# Altium PCB Panorama_V_0_0_1.PcbDoc (part 1 of 2)
Units mm, origin at the board's own origin, x right, y up, seen from the top; angles counter-clockwise.
Board outline 60 x 100 mm, 4 copper layers (Top Layer, Layer 2, Layer 3, Bottom Layer), stack 0.745 mm thick; 113 components, 88 nets, 449 pads, 202 vias.
Unrouted connection lines stored in the file: 3.
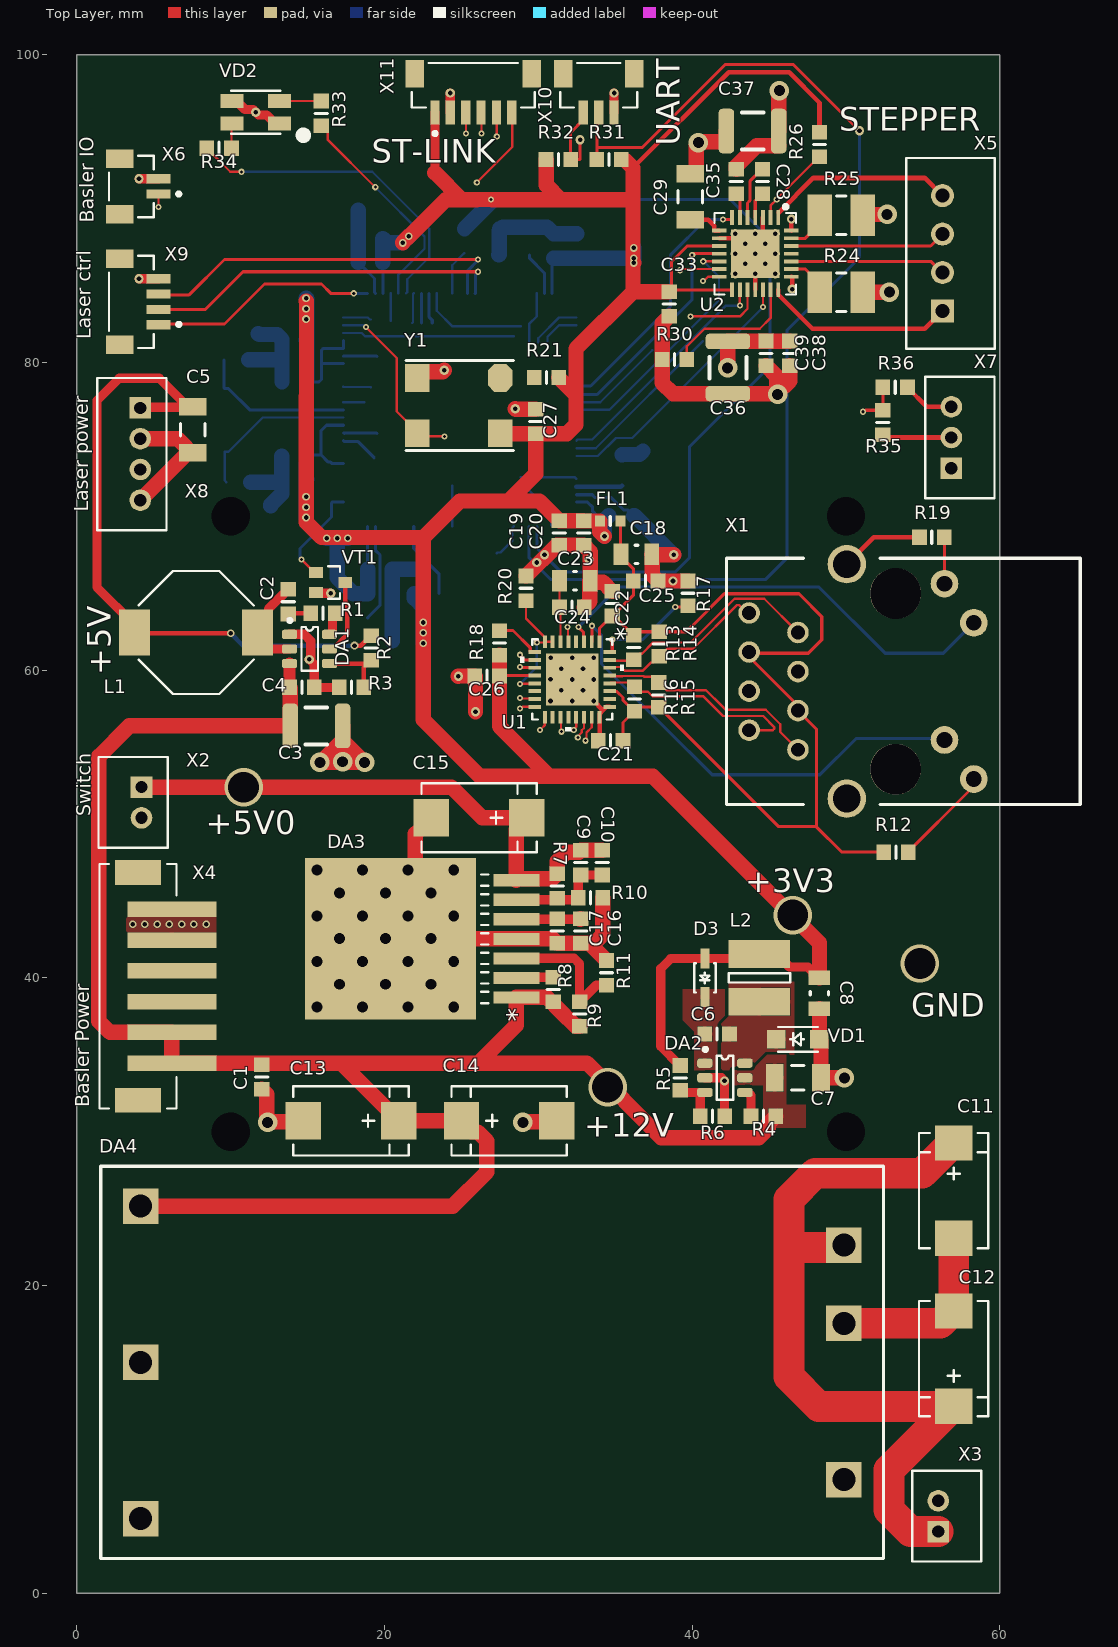
[diagram p0: Top Layer view]
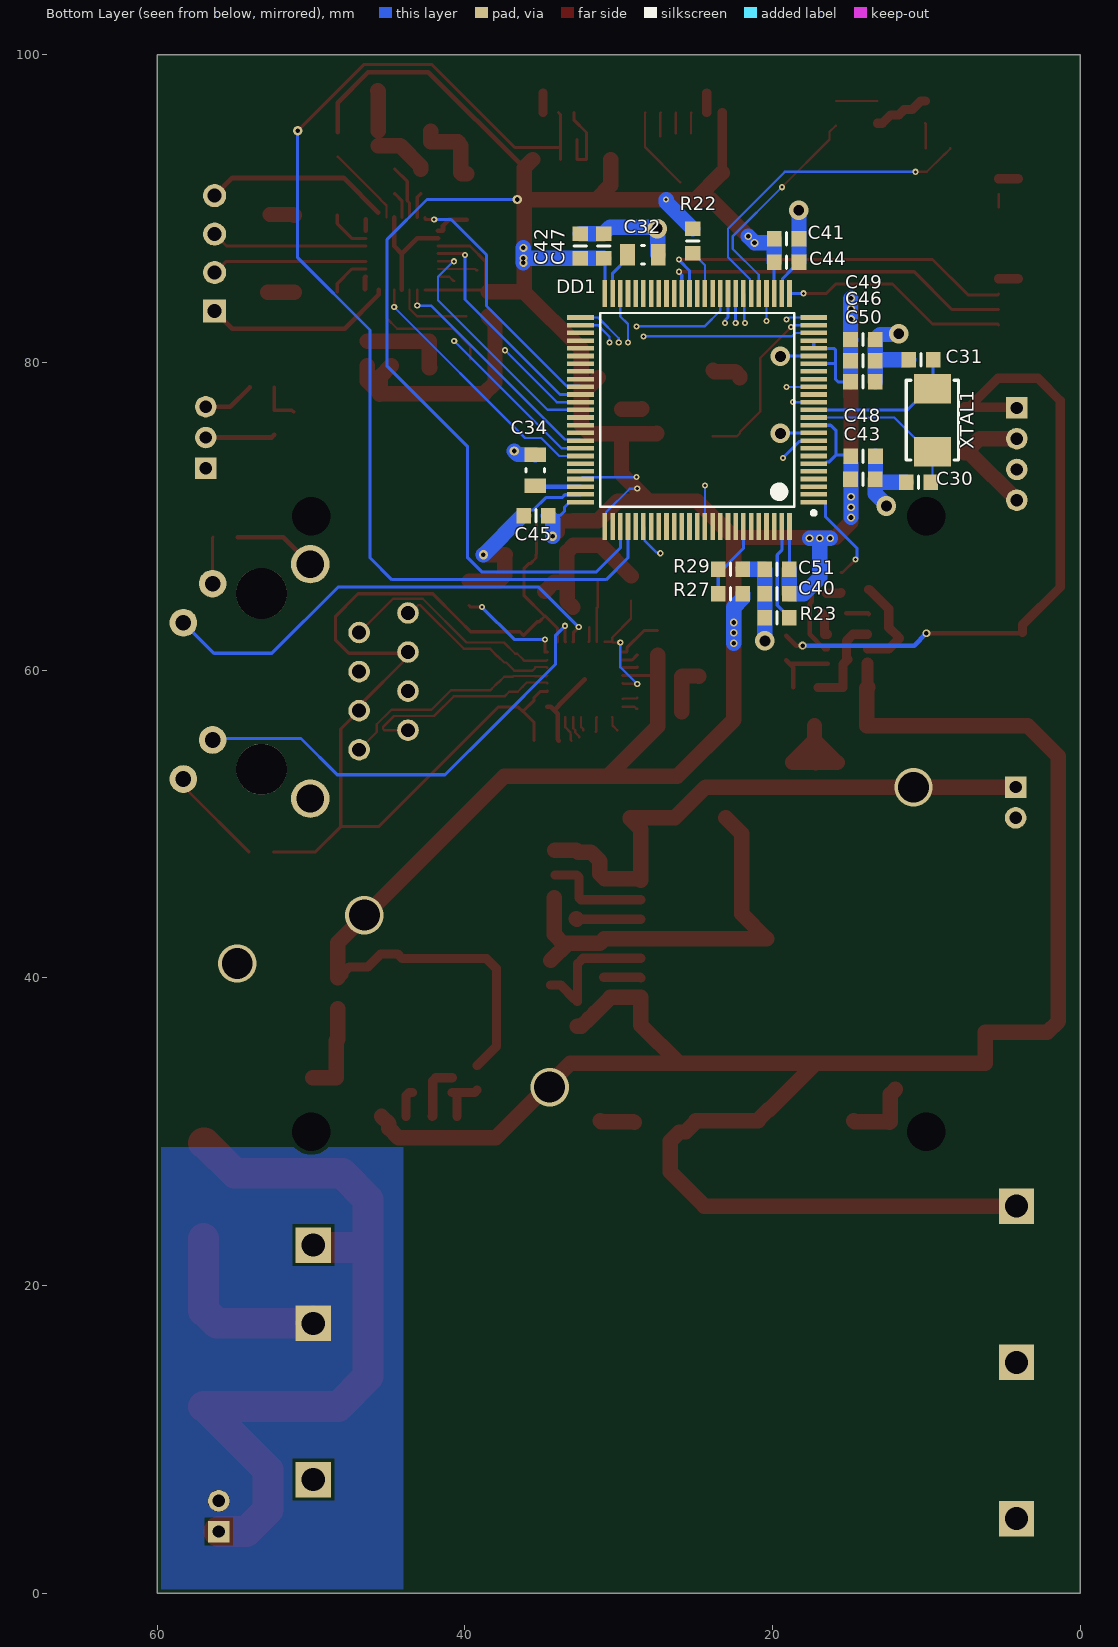
[diagram p1: Bottom Layer view, seen from below]
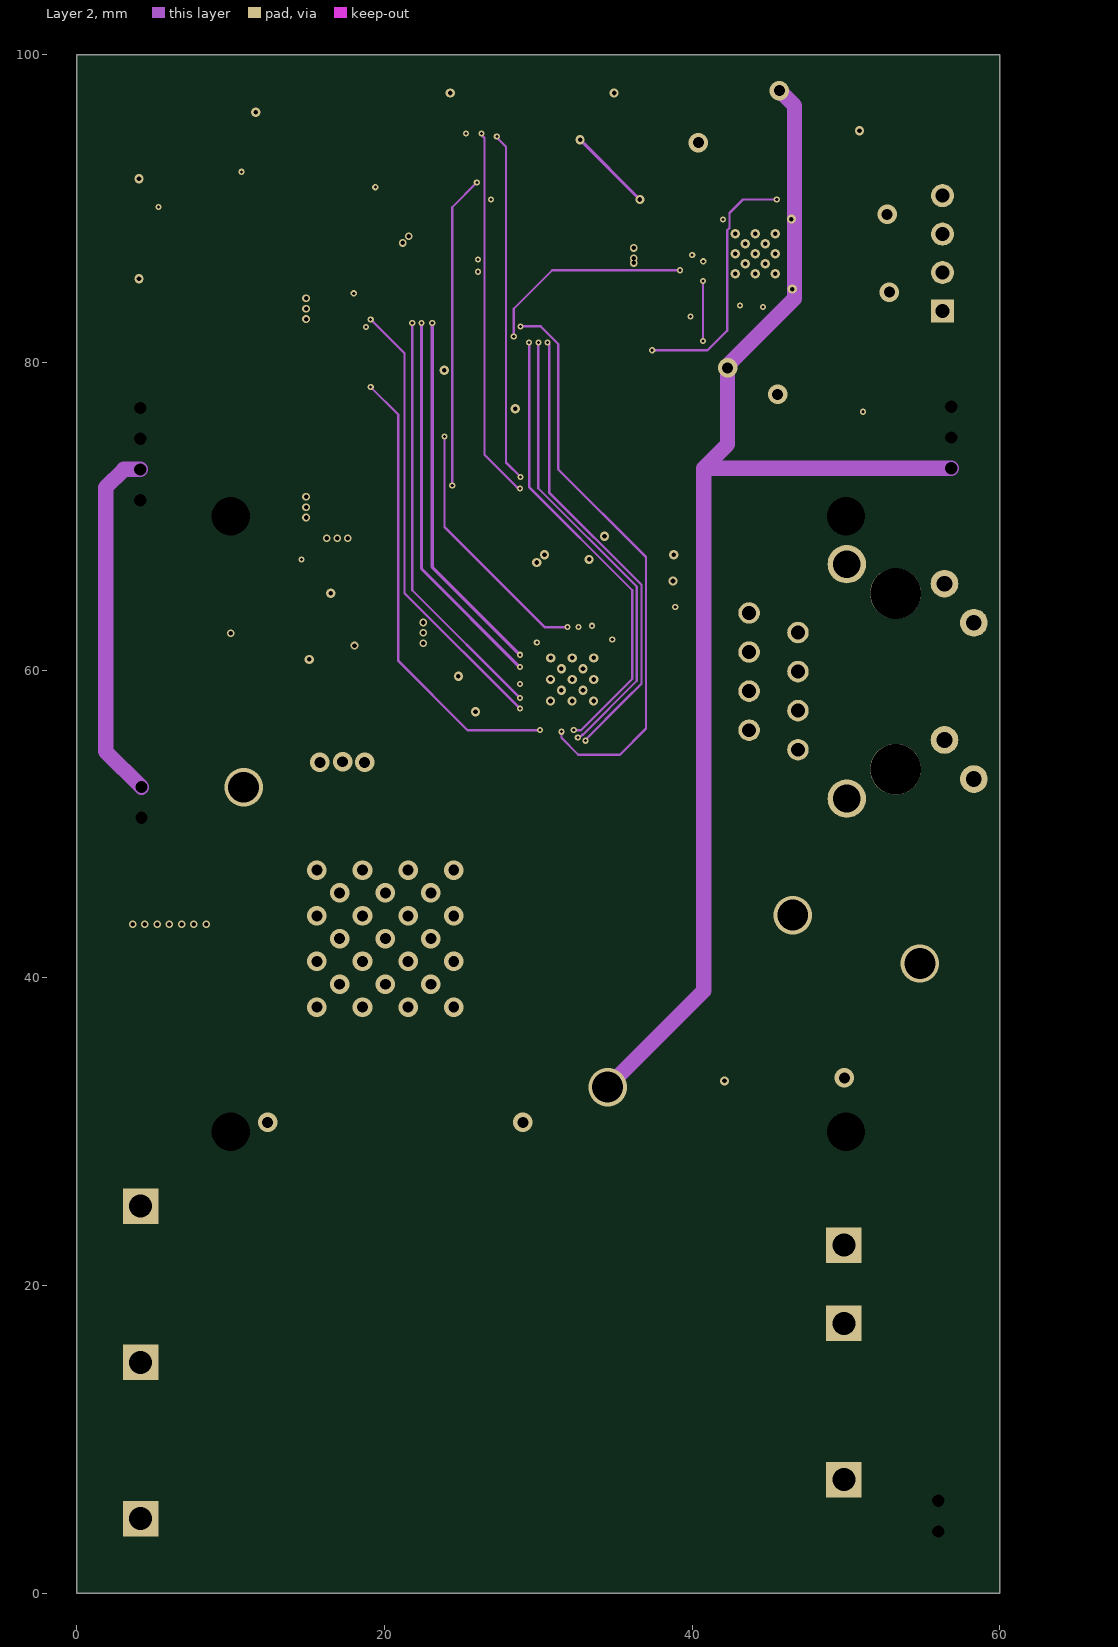
[diagram p2: Layer 2]
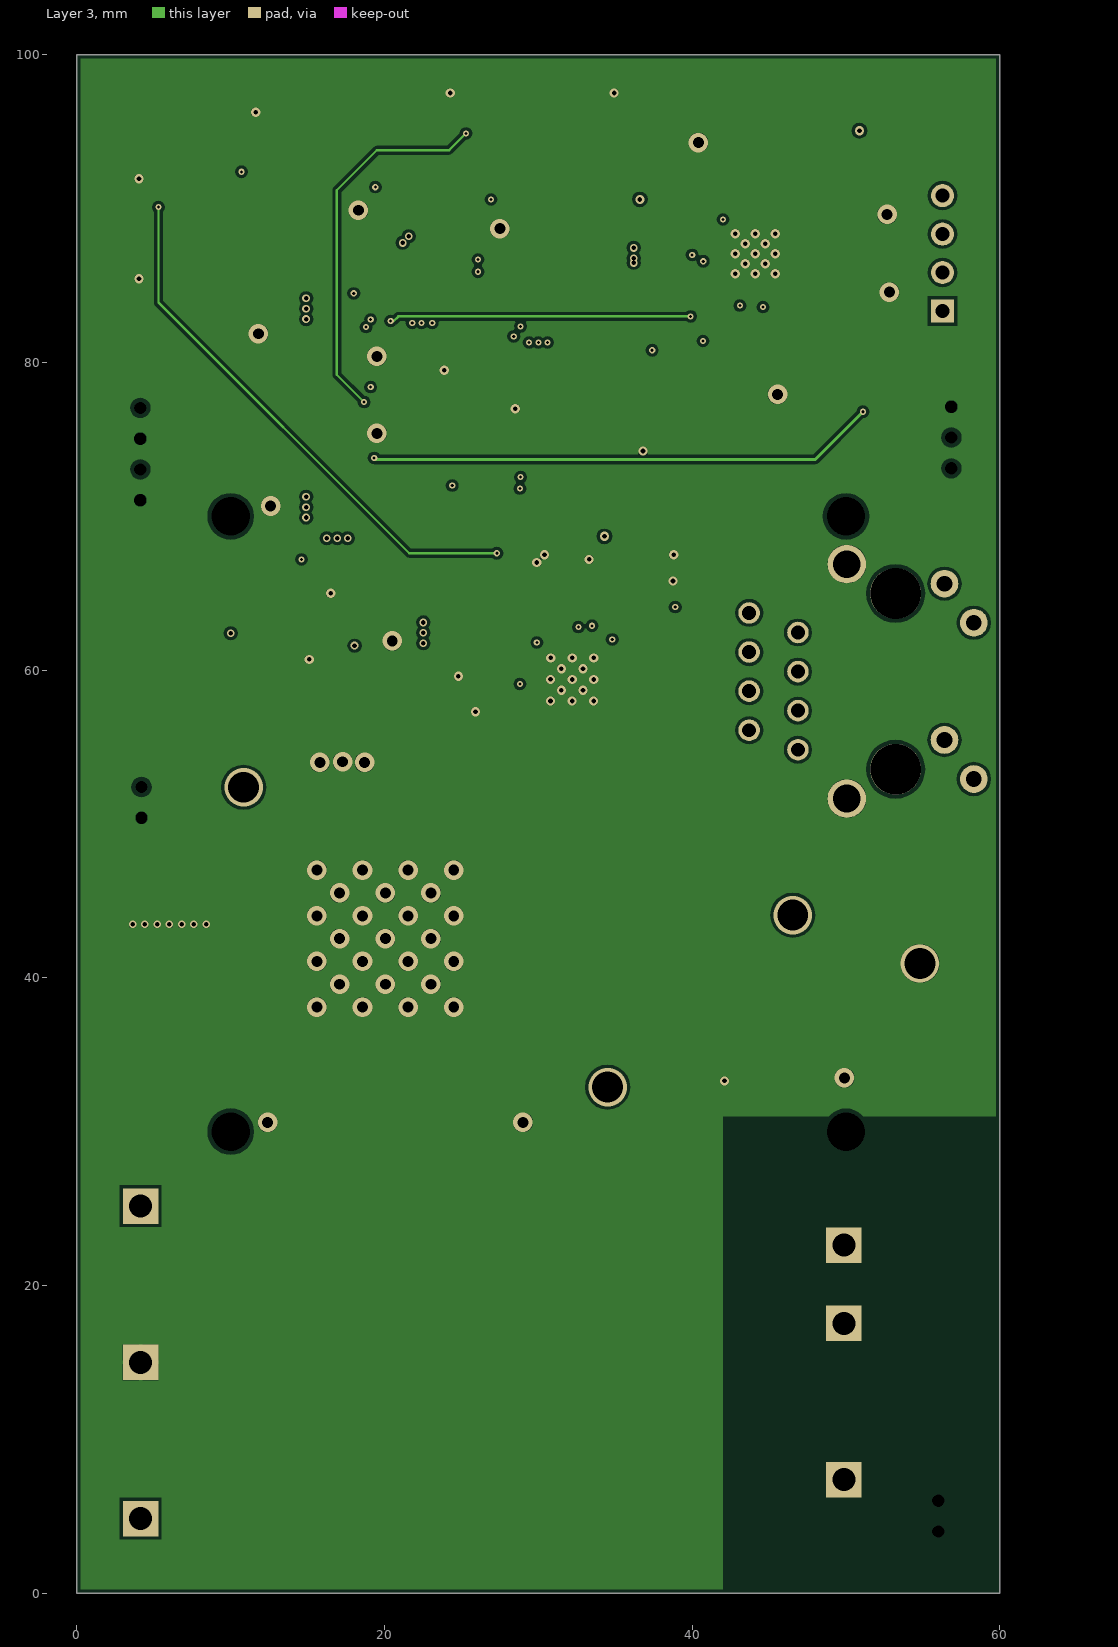
[diagram p3: Layer 3]
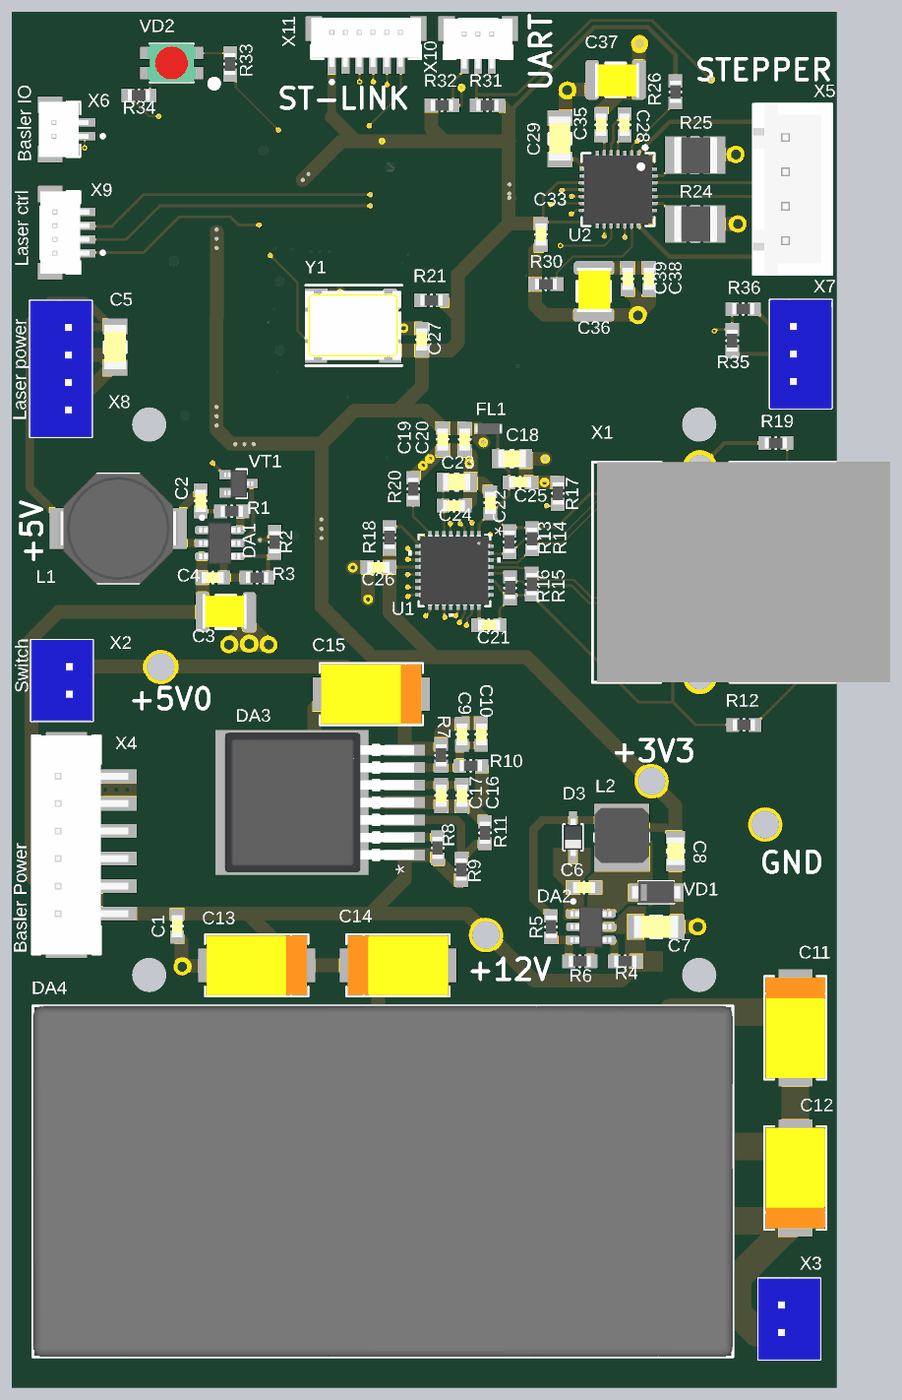
[diagram p5: 3D render of the assembled board from above, using the file's embedded part models]
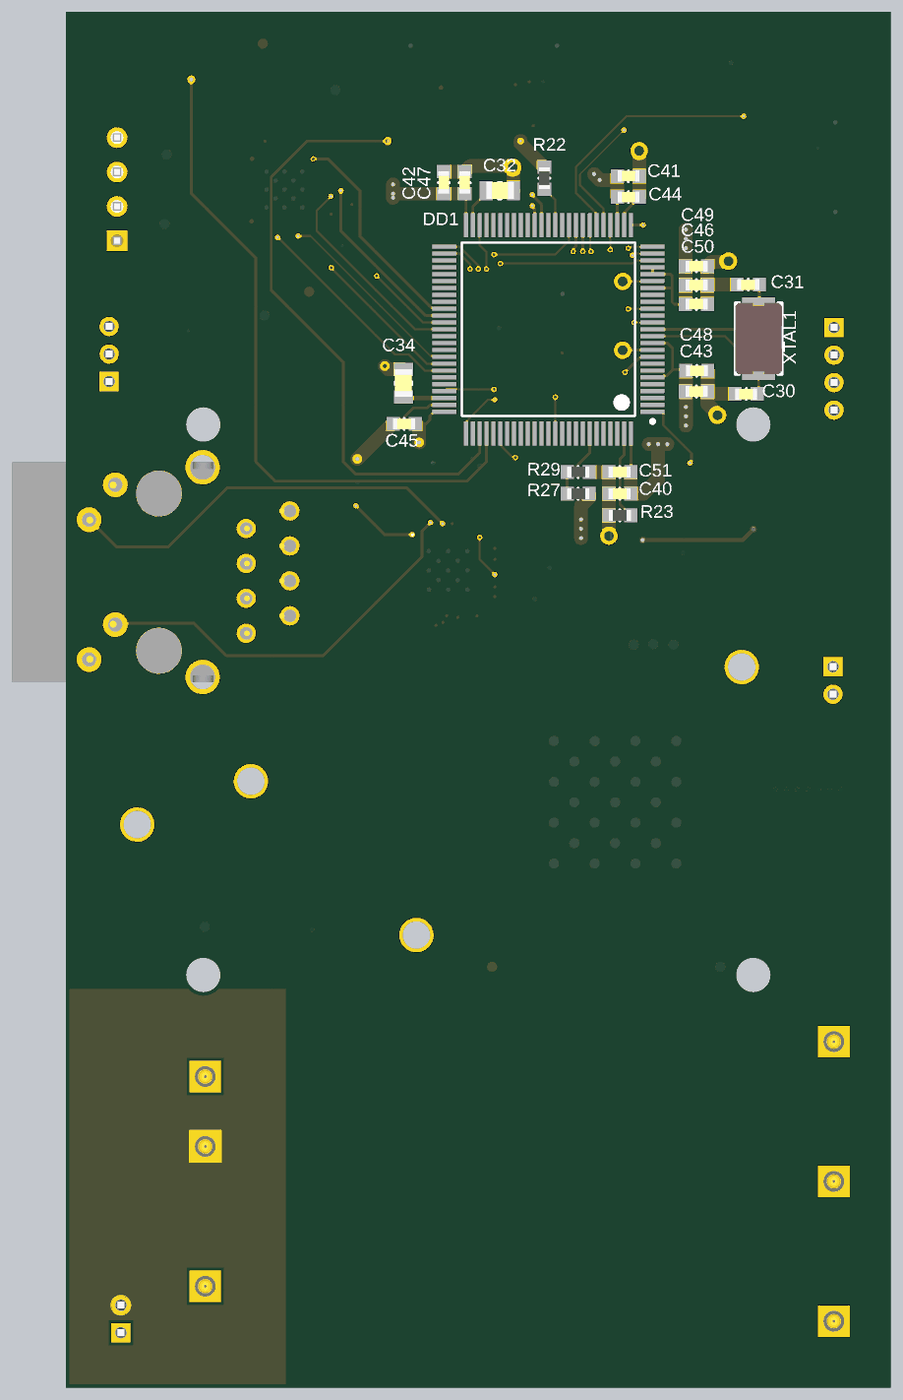
[diagram p6: 3D render of the assembled board from below, using the file's embedded part models]

## Layer stack, top to bottom
Top Solder: solder mask 0.0102, Solder Resist, Dk 3.5
Top Layer: signal copper 0.035
Dielectric 2: prepreg 0.0711, PP-006, Dk 4.1
Dielectric 3: prepreg 0.0711, PP-006, Dk 4.1
Layer 2: signal copper 0.035
Dielectric 1: dielectric 0.32, FR-4, Dk 4.8
Layer 3: signal copper 0.035
Dielectric 4: prepreg 0.0711, PP-006, Dk 4.1
Dielectric 5: prepreg 0.0711, PP-006, Dk 4.1
Bottom Layer: signal copper 0.035
Bottom Solder: solder mask 0.0102, Solder Resist, Dk 3.5

## Board outline
0,0 0,100 60,100 60,0

## Design rules (kind name [scope] priority, off if disabled: settings)
AcuteAngle [All] p1: minimum=3.50000000000000E+0001 checktracksonly=FALSE
BoardOutlineClearance "BoardOutlineClearance 1" [All] p1: gap=0.25 ignorepadtopadclearanceinfootprint=FALSE except(0: Arc-SplitContinuation Track-SplitContinuation SMDPad-SplitContinuation THPad-SplitContinuation Via-SplitContinuation Fill-SplitContinuation Poly-SplitContinuation Region-SplitContinuation Text-SplitContinuation) // Milling
BoardOutlineClearance "BoardOutlineClearance 2" [All] p2: gap=0.4 ignorepadtopadclearanceinfootprint=FALSE except(0: Arc-SplitContinuation Track-SplitContinuation SMDPad-SplitContinuation THPad-SplitContinuation Via-SplitContinuation Fill-SplitContinuation Poly-SplitContinuation Region-SplitContinuation Text-SplitContinuation) // V-Cut
Clearance "Clearance 3 Oz" [All] p1 off: gap=0.35 ignorepadtopadclearanceinfootprint=FALSE except(0.25: Arc-Hole Track-Hole SMDPad-Hole THPad-Hole Via-Hole Fill-Hole Poly-Hole Region-Hole Text-Hole)
Clearance "Clearance 2 Oz" [All] p2 off: gap=0.3 ignorepadtopadclearanceinfootprint=FALSE except(0.25: Arc-Hole Track-Hole SMDPad-Hole THPad-Hole Via-Hole Fill-Hole Poly-Hole Region-Hole Text-Hole)
Clearance "Clearance-1 1 Oz" [All] p3 off: gap=0.2 ignorepadtopadclearanceinfootprint=FALSE except(0.25: Arc-Hole Track-Hole SMDPad-Hole THPad-Hole Via-Hole Fill-Hole Poly-Hole Region-Hole Text-Hole) // Standart
Clearance "Clearance-2 1 Oz" [All] p4: gap=0.15 ignorepadtopadclearanceinfootprint=FALSE except(0.2: Arc-Fill Arc-Poly Track-Fill Track-Poly SMDPad-Fill SMDPad-Poly THPad-Fill THPad-Poly Via-Fill Via-Poly Fill-Fill Fill-Poly Poly-Poly; 0.25: Arc-Hole Track-Hole SMDPad-Hole THPad-Hole Via-Hole Fill-Hole Poly-Hole Region-Hole Text-Hole) // Advance
Clearance "Clearance-1 1/2 Oz" [All] p5 off: gap=0.125 ignorepadtopadclearanceinfootprint=FALSE except(0.2: Arc-Fill Arc-Poly Track-Fill Track-Poly SMDPad-SMDPad SMDPad-Fill SMDPad-Poly THPad-Fill THPad-Poly Via-Fill Via-Poly Fill-Fill Fill-Poly Poly-Poly Poly-Region Poly-Text; 0.25: Arc-Hole Track-Hole SMDPad-Hole THPad-Hole Via-Hole Fill-Hole Poly-Hole Region-Hole Text-Hole) // Standart
Clearance "Clearance-2 1/2 Oz" [All] p6 off: gap=0.1 ignorepadtopadclearanceinfootprint=FALSE except(0.15: Arc-Fill Arc-Poly Track-Fill Track-Poly SMDPad-SMDPad SMDPad-Fill SMDPad-Poly THPad-Fill THPad-Poly Via-Fill Via-Poly Fill-Fill Fill-Poly Poly-Poly Poly-Region Poly-Text; 0.25: Arc-Hole Track-Hole SMDPad-Hole THPad-Hole Via-Hole Fill-Hole Poly-Hole Region-Hole Text-Hole) // Advance
DiffPairsRouting "DiffPairsRouting 1 Oz" [All] p1: maxlimit=0.254 minlimit=0.2 mostfreqgap=0.254 toplayer_minwidth=0.1 toplayer_maxwidth=0.381 toplayer_prefwidth=0.15 midlayer1_minwidth=0.1 midlayer1_maxwidth=0.381 midlayer1_prefwidth=0.15 midlayer2_minwidth=0.1 midlayer2_maxwidth=0.381 midlayer2_prefwidth=0.15 bottomlayer_minwidth=0.1 bottomlayer_maxwidth=0.381 bottomlayer_prefwidth=0.15 maxuncoupledlength=12.7
DiffPairsRouting "DiffPairsRouting 1/2 Oz" [All] p2 off: maxlimit=0.254 minlimit=0.1 mostfreqgap=0.254 toplayer_minwidth=0.1 toplayer_maxwidth=0.381 toplayer_prefwidth=0.381 midlayer1_minwidth=0.1 midlayer1_maxwidth=0.381 midlayer1_prefwidth=0.381 midlayer2_minwidth=0.1 midlayer2_maxwidth=0.381 midlayer2_prefwidth=0.381 bottomlayer_minwidth=0.1 bottomlayer_maxwidth=0.381 bottomlayer_prefwidth=0.381 maxuncoupledlength=12.7
HoleSize "Minimum HoleSize" [IsPad] p1: absolutevalues=TRUE maxlimit=5.9 minlimit=0.6 maxpercent=80.000 minpercent=20.000
HoleSize "Minimum HoleSize VIA 1" [IsVia] p2: absolutevalues=TRUE maxlimit=5.9 minlimit=0.3 maxpercent=80.000 minpercent=20.000 // Standart
HoleSize "Minimum HoleSize VIA 2" [IsVia] p3: absolutevalues=TRUE maxlimit=5.9 minlimit=0.2 maxpercent=80.000 minpercent=20.000 // Advance
HoleToHoleClearance Hole2HoleClearance [All] p1: gap=0.25 allowstackedmicrovias=FALSE
MinimumAnnularRing "Minimum AR VIA Standart" [IsVia] p1: minimumring=0.15
MinimumAnnularRing "Minimum AR PAD Standart" [IsPAD] p2: minimumring=0.2
MinimumAnnularRing "Minimum AR VIA Advance" [IsVia] p3: minimumring=0.1
MinimumAnnularRing "Minimum AR PAD Advance" [IsPAD] p4: minimumring=0.15
MinimumSolderMaskSliver "SolderMask Bridge Standart" [All] p1: minsoldermaskwidth=0.15 // All Masks
MinimumSolderMaskSliver "SolderMask Bridge Advance" [All] p2: minsoldermaskwidth=0.1 // Mask LDI
PlaneClearance "PlaneClearance 3 Oz" [All] p1: clearance=0.35
PlaneClearance "PlaneClearance 2 Oz" [All] p2: clearance=0.3
PlaneClearance "PlaneClearance 1 Oz" [All] p3: clearance=0.2
PlaneClearance "PlaneClearance-1 1/2 Oz" [All] p4: clearance=0.2 // Standart
PlaneClearance "PlaneClearance-2 1/2 Oz" [All] p5: clearance=0.15 // Advance
PlaneConnect "TermalConnect 3 Oz" [All] p1: planeconnectstyle=Relief reliefexpansion=0.2 reliefentries=4 reliefconductorwidth=0.35 reliefairgap=0.35 // Standart
PlaneConnect "TermalConnect 2 Oz" [All] p2: planeconnectstyle=Relief reliefexpansion=0.2 reliefentries=4 reliefconductorwidth=0.3 reliefairgap=0.3 // Standart
PlaneConnect "TermalConnect-1 1 Oz" [All] p3: planeconnectstyle=Relief reliefexpansion=0.2 reliefentries=4 reliefconductorwidth=0.2 reliefairgap=0.2 // Standart
PlaneConnect "TermalConnect-2 1 Oz" [All] p4: pad.planeconnectstyle=Relief pad.reliefexpansion=0.15 pad.reliefentries=4 pad.reliefconductorwidth=0.2 pad.reliefairgap=0.2 via.planeconnectstyle=Direct via.reliefexpansion=0.15 via.reliefentries=4 via.reliefconductorwidth=0.15 via.reliefairgap=0.15 // Advance
PlaneConnect "TermalConnect-1 1/2 Oz" [All] p5: planeconnectstyle=Relief reliefexpansion=0.2 reliefentries=4 reliefconductorwidth=0.2 reliefairgap=0.2 // Standart
PlaneConnect "TermalConnect-2 1/2 Oz" [All] p6: pad.planeconnectstyle=Relief pad.reliefexpansion=0.15 pad.reliefentries=4 pad.reliefconductorwidth=0.15 pad.reliefairgap=0.15 via.planeconnectstyle=Direct via.reliefexpansion=0.15 via.reliefentries=4 via.reliefconductorwidth=0.15 via.reliefairgap=0.15 // Advance
PolygonConnect "PolygonConnect 3 Oz" [All] p1 off: thpad.connectstyle=Relief thpad.reliefconductorwidth=0.35 thpad.reliefentries=4 thpad.polygonreliefangle="90 Angle" thpad.airgapwidth=0.35 smdpad.connectstyle=Relief smdpad.reliefconductorwidth=0.35 smdpad.reliefentries=4 smdpad.polygonreliefangle="90 Angle" smdpad.airgapwidth=0.35 via.connectstyle=Direct via.reliefconductorwidth=0.254 via.reliefentries=4 via.polygonreliefangle="90 Angle" via.airgapwidth=0.254
PolygonConnect "PolygonConnect 2 Oz" [All] p2 off: thpad.connectstyle=Relief thpad.reliefconductorwidth=0.3 thpad.reliefentries=4 thpad.polygonreliefangle="90 Angle" thpad.airgapwidth=0.3 smdpad.connectstyle=Relief smdpad.reliefconductorwidth=0.3 smdpad.reliefentries=4 smdpad.polygonreliefangle="90 Angle" smdpad.airgapwidth=0.3 via.connectstyle=Direct via.reliefconductorwidth=0.254 via.reliefentries=4 via.polygonreliefangle="90 Angle" via.airgapwidth=0.254
PolygonConnect "PolygonConnect-1 1 Oz" [All] p3 off: thpad.connectstyle=Relief thpad.reliefconductorwidth=0.2 thpad.reliefentries=4 thpad.polygonreliefangle="90 Angle" thpad.airgapwidth=0.2 smdpad.connectstyle=Relief smdpad.reliefconductorwidth=0.2 smdpad.reliefentries=4 smdpad.polygonreliefangle="90 Angle" smdpad.airgapwidth=0.2 via.connectstyle=Direct via.reliefconductorwidth=0.254 via.reliefentries=4 via.polygonreliefangle="90 Angle" via.airgapwidth=0.254 // Standart
PolygonConnect "PolygonConnect-2 1 Oz" [All] p4 off: thpad.connectstyle=Relief thpad.reliefconductorwidth=0.15 thpad.reliefentries=4 thpad.polygonreliefangle="90 Angle" thpad.airgapwidth=0.15 smdpad.connectstyle=Relief smdpad.reliefconductorwidth=0.15 smdpad.reliefentries=4 smdpad.polygonreliefangle="90 Angle" smdpad.airgapwidth=0.15 via.connectstyle=Direct via.reliefconductorwidth=0.254 via.reliefentries=4 via.polygonreliefangle="90 Angle" via.airgapwidth=0.254 // Advance
PolygonConnect "PolygonConnect-1 1/2 Oz" [All] p5 off: thpad.connectstyle=Relief thpad.reliefconductorwidth=0.15 thpad.reliefentries=4 thpad.polygonreliefangle="90 Angle" thpad.airgapwidth=0.2 smdpad.connectstyle=Relief smdpad.reliefconductorwidth=0.2 smdpad.reliefentries=4 smdpad.polygonreliefangle="90 Angle" smdpad.airgapwidth=0.2 via.connectstyle=Direct via.reliefconductorwidth=0.254 via.reliefentries=4 via.polygonreliefangle="90 Angle" via.airgapwidth=0.254 // Standart
PolygonConnect "PolygonConnect-2 1/2 Oz" [All] p6 off: thpad.connectstyle=Relief thpad.reliefconductorwidth=0.125 thpad.reliefentries=4 thpad.polygonreliefangle="90 Angle" thpad.airgapwidth=0.15 smdpad.connectstyle=Relief smdpad.reliefconductorwidth=0.125 smdpad.reliefentries=4 smdpad.polygonreliefangle="90 Angle" smdpad.airgapwidth=0.15 via.connectstyle=Direct via.reliefconductorwidth=0.254 via.reliefentries=4 via.polygonreliefangle="90 Angle" via.airgapwidth=0.254 // Advance
RoutingVias [All] p1: holewidth=0.3 width=0.6 viastyle="Through Hole" minholewidth=0.2 minwidth=0.4 maxholewidth=5.9 maxwidth=6.4
SMDNeckDown [All] p1 off: percent=50.000
SilkToSilkClearance Silk2SilkClearance [All] p1 off: silktosilkclearance=0.15
SilkToSolderMaskClearance Silk2SolderMaskClearance [IsPad] p1 off: minsilkscreentomaskgap=0.15 clearancetoexposedcopper=TRUE
SolderMaskExpansion SolderMaskExpansion-1 [All] p1: expansion=0.05 istentingtop=FALSE // Standart
SolderMaskExpansion "SolderMaskExpansion LDI" [All] p2: expansion=0.025 istentingtop=FALSE // Advance
UnRoutedNet [All] p1: checkbadconnections=TRUE
UnpouredPolygon [All] p1 off:
Width "Width 3 Oz" [All] p1 off: maxlimit=10 minlimit=0.35 preferedwidth=0.4 checkconnectedcopper=TRUE
Width "Width 2 Oz" [All] p2 off: maxlimit=10 minlimit=0.3 preferedwidth=0.35 minimp=50.000000 maximp=50.000000 favimp=50.000000 checkconnectedcopper=TRUE
Width "Width 1 Oz" [All] p3: maxlimit=10 minlimit=0.15 preferedwidth=0.2 checkconnectedcopper=TRUE
Width "Width 1/2 Oz" [All] p4 off: maxlimit=10 minlimit=0.1 preferedwidth=0.125 checkconnectedcopper=TRUE
20 further rules are at their usual default settings.

## Classes and differential pairs
component class U_POWER: C2 C3 C4 C5 C6 C7 C8 C9 C10 C11 C12 C13 C14 C15 C16 C17 D3 DA1 DA2 DA3 DA4 L1 L2 R1 R2 R3 R4 R5 R6 R7 R8 R9 R10 R11 VD1 VT1
component class U_MCU: C28 C29 C30 C31 C32 C33 C34 C35 C36 C37 C38 C39 C40 C41 C42 C43 C44 C45 C46 C47 C48 C49 C50 C51 DD1 R22 R23 R24 R25 R26 R27 R29 R30 R31 R32 R33 R34 R35 R36 U2 VD2 XTAL1
component class U_LAN: C18 C19 C20 C21 C22 C23 C24 C25 C26 C27 FL1 R12 R13 R14 R15 R16 R17 R18 R19 R20 R21 U1 Y1
component class Panorama_V_0_0_1: C1 X1 X2 X3 X4 X5 X6 X7 X8 X9 X10 X11
differential pair TX: +TX_P -TX_N
differential pair RX: +RX_P -RX_N

## Components (designator, comment, footprint, x,y, rotation, side; value= is the part's Value field where it differs from the comment)
C1 "C0603-0.1uF-50V-X7R" C0603 12.025,33.55 r90 top value=0.1uF
C2 "C0603-0.1uF-50V-X7R" C0603 13.75,64.45 r270 top value=0.1uF
C3 "C1210-10uF-50V-X7R" C1210 15.575,56.379 r180 top value=10uF
C4 "C0603-0.1uF-50V-X7R" C0603 14.625,58.879 r0 top value=0.1uF
C5 "C1206-100uF-10V-X5R" C1206 7.525,75.625 r90 top value=100uF
C6 "C0603-0.1uF-50V-X7R" C0603 41.625,36.35 r180 top value=0.1uF
C7 "C1206-2.2uF-50V-X7R" C1206 46.875,33.5 r180 top value=2.2uF
C8 "C0805-22uF-10V-X5R" C0805 48.275,39 r90 top value=22uF
C9 "C0603-0.012uF-50V-X7R" C0603 32.753,47.488 r90 top value=0.012uF
C10 "C0603-0.01uF-50V-X7R" C0603 34.15,47.488 r90 top value=0.01uF
C11 "CTD-22uF-35V" CTD 57,26.162 r270 top value=22uF
C12 "CTD-22uF-35V" CTD 57,15.24 r90 top value=22uF
C13 "CTD-22uF-35V" CTD 17.825,30.7 r180 top value=22uF
C14 "CTD-22uF-35V" CTD 28.1,30.7 r0 top value=22uF
C15 "CTD-100uF-16V" CTD 26.149,50.409 r180 top value=100uF
C16 "C0603-0.01uF-50V-X7R" C0603 32.753,43.043 r90 top value=0.01uF
C17 "C0603-0.012uF-50V-X7R" C0603 31.229,43.043 r90 top value=0.012uF
C18 "C0805-22uF-10V-X5R" C0805 36.376,67.522 r180 top value=22uF
C19 "C0603-22uF-6.3V-X5R" C0603 31.351,68.922 r90 top value=22uF
C20 "C0603-22uF-6.3V-X5R" C0603 32.951,68.922 r90 top value=22uF
C21 "C0603-0.1uF-50V-X7R" C0603 34.701,55.422 r180 top value=0.1uF
C22 "C0603-0.1uF-50V-X7R" C0603 34.801,64.322 r90 top value=0.1uF
C23 "C0805-22uF-10V-X5R" C0805 32.376,65.822 r0 top value=22uF
C24 "C0603-0.1uF-50V-X7R" C0603 32.176,64.097 r0 top value=0.1uF
C25 "C0603-0.1uF-50V-X7R" C0603 36.975,65.8 r180 top value=0.1uF
C26 "C0603-0.1uF-50V-X7R" C0603 26.675,59.625 r0 top value=0.1uF
C27 "C0603-0.1uF-50V-X7R" C0603 29.825,76.175 r270 top value=0.1uF
C28 "C0603-2200pF-50V-X7R" C0603 44.575,91.775 r270 top value=2200pF
C29 "C1206-2.2uF-25V-X5R" C1206 39.875,90.775 r270 top value=2.2uF
C30 "C0603-12pF-50V-NP0" C0603 10.51,72.225 r180 bottom value=12pF
C31 "C0603-12pF-50V-NP0" C0603 10.36,80.175 r180 bottom value=12pF
C32 "C0805-2.2uF-16V-Y5V" C0805 28.435,87 r0 bottom value=2.2uF
C33 "C0603-0.1uF-50V-X7R" C0603 38.5,83.8 r270 top value=0.1uF
C34 "C0805-2.2uF-16V-Y5V" C0805 35.435,73 r270 bottom value=2.2uF
C35 "C0603-0.1uF-50V-X7R" C0603 42.875,91.775 r270 top value=0.1uF
C36 "C1210-10uF-50V-X7R" C1210 42.325,79.675 r90 top value=10uF
C37 "C1210-10uF-50V-X7R" C1210 43.925,95.05 r0 top value=10uF
C38 "C0603-0.1uF-50V-X7R" C0603 46.35,80.6 r90 top value=0.1uF
C39 "C0603-1uF-50V-X5R" C0603 44.8,80.6 r90 top value=1uF
C40 "C0603-0.1uF-50V-X7R" C0603 19.71,64.975 r180 bottom value=0.1uF
C41 "C0603-4.7uF-16V-X5R" C0603 19.085,88.05 r0 bottom value=4.7uF
C42 "C0603-0.1uF-50V-X7R" C0603 32.51,87.575 r270 bottom value=0.1uF
C43 "C0603-4.7uF-16V-X5R" C0603 14.135,72.4 r0 bottom value=4.7uF
C44 "C0603-0.1uF-50V-X7R" C0603 19.085,86.525 r0 bottom value=0.1uF
C45 "C0603-4.7uF-16V-X5R" C0603 35.385,70.05 r180 bottom value=4.7uF
C46 "C0603-0.1uF-50V-X7R" C0603 14.135,80.125 r0 bottom value=0.1uF
C47 "C0603-4.7uF-16V-X5R" C0603 30.985,87.575 r270 bottom value=4.7uF
C48 "C0603-0.1uF-50V-X7R" C0603 14.11,73.9 r0 bottom value=0.1uF
C49 "C0603-4.7uF-16V-X5R" C0603 14.135,81.5 r0 bottom value=4.7uF
C50 "C0603-0.1uF-50V-X7R" C0603 14.135,78.744 r0 bottom value=0.1uF
C51 "C0603-4.7uF-16V-X5R" C0603 19.71,66.55 r180 bottom value=4.7uF
D3 "1N4148W" SOD323 40.825,40 r270 top
DA1 "TPS56339DDCR" SOT23-6 15.125,61.379 r0 top
DA2 "LT1933ES6" SOT23-6 42.125,33.5 r0 top
DA3 "LMZ12003TZ-ADJ" TZA07A 20.434,42.535 r90 top
DA4 "URB2412LD-30WR3" URB2412LD-30WR3 27,15 r180 top
DD1 "STM32F407VET6" LQFP100 24.9,76.925 r0 bottom
FL1 "BLM18PG121SN1D" BLM18AG102BH1D 34.676,69.697 r0 top
L1 "CDRH8D43NP-4R7NC" CDRH8D43 7.75,62.45 r180 top value=4.7uH
L2 "VLCF4020T-100MR85" VLCF4020T 44.375,40 r180 top value=10uH
R1 "R0603-30-1%" R0603 16,63.7 r180 top value=30
R2 "R0603-51K-1%" R0603 19.125,61.45 r90 top value=51K
R3 "R0603-10K-1%" R0603 17.85,58.879 r0 top value=10K
R4 "R0603-10K-1%" R0603 44.625,31 r0 top value=10K
R5 "R0603-16.9K-1%" R0603 39.225,33.5 r90 top value=16.9K
R6 "R0603-10K-1%" R0603 41.325,31 r180 top value=10K
R7 "R0603-5.36K-1%" R0603 31.229,45.964 r90 top value=5.36K
R8 "R0603-61.9K-1%" R0603 30.975,39.233 r90 top value=61.9K
R9 "R0603-10K-1%" R0603 32.703,37.654 r270 top value=10K
R10 "R0603-1K-1%" R0603 33.388,45.202 r180 top value=1K
R11 "R0603-3.6K-1%" R0603 34.428,40.329 r270 top value=3.6K
R12 "R0603-270-1%" R0603 53.253,48.174 r180 top value=270
R13 "R0603-49.9-1%" R0603 36.201,61.472 r90 top value=49.9
R14 "R0603-49.9-1%" R0603 37.851,61.697 r90 top value=49.9
R15 "R0603-49.9-1%" R0603 37.826,58.397 r270 top value=49.9
R16 "R0603-49.9-1%" R0603 36.251,58.122 r270 top value=49.9
R17 "R0603-12.1K-1%" R0603 39.725,65 r90 top value=12.1K
R18 "R0603-10K-1%" R0603 27.475,61.775 r90 top value=10K
R19 "R0603-270-1%" R0603 55.575,68.65 r0 top value=270
R20 "R0603-10K-1%" R0603 29.2,65.325 r270 top value=10K
R21 "R0603-10K-1%" R0603 30.525,79.025 r0 top value=10K
R22 "R0603-10K-1%" R0603 25.2,87.9 r270 bottom value=10K
R23 "R0603-10K-1%" R0603 19.71,63.4 r0 bottom value=10K
R24 "R1210-0.12-1%" R1210 49.7,84.575 r180 top value=0.12
R25 "R1210-0.12-1%" R1210 49.7,89.575 r180 top value=0.12
R26 "R0603-10K-1%" R0603 48.275,94.175 r90 top value=10K
R27 "R0603-10K-1%" R0603 22.735,64.975 r180 bottom value=10K
R29 "R0603-10K-1%" R0603 22.735,66.55 r180 bottom value=10K
R30 "R0603-100K-1%" R0603 38.85,80.2 r0 top value=100K
R31 "R0603-100K-1%" R0603 34.6,93.2 r180 top value=100K
R32 "R0603-100K-1%" R0603 31.3,93.2 r0 top value=100K
R33 "R0603-75-1%" R0603 15.875,96.2 r90 top value=75
R34 "R0603-100-1%" R0603 9.25,93.925 r0 top value=100
R35 "R0603-110K-1%" R0603 52.4,76.1 r270 top value=110K
R36 "R0603-41.2K-1%" R0603 53.2,78.4 r180 top value=41.2K
U1 "LAN8710A-EZC" QFN32_5X5MC_MCH 32.201,59.397 r270 top
U2 "TMC2209-LA" QFN28 44.1,87.075 r270 top
VD1 "CRS09" SFLAT 46.875,36 r180 top
VD2 "KAA-3528ESGC" KAA-3528 11.625,96.275 r180 top
VT1 "DDTC114EUA-7-F" SOT323 16.5,65.7 r270 top
X1 "LU1T516-43" LU1T516-43 53.228,59.274 r270 top
X2 "B2B-PH-K-S" B2B-PH-K-S 4.2,51.4 r270 top
X3 "B2B-PH-K-S" B2B-PH-K-S 56,5 r90 top
X4 "B6B-PH-SM4-TB" B6B-PH-SM4-TB 5.075,39.45 r90 top
X5 "B4B-XH-A" B4B-XH-A 56.275,87.1 r90 top
X6 "BM02B-SRSS-TB" BM02B-SRSS-TB 4.05,91.45 r90 top
X7 "B3B-PH-K-S" B3B-PH-K-S 56.85,75.125 r90 top
X8 "B4B-PH-K-S" B4B-PH-K-S 4.125,74.05 r270 top
X9 "BM04B-SRSS-TB" BM04B-SRSS-TB 4.05,83.95 r90 top
X10 "BM03B-SRSS-TB" BM03B-SRSS-TB 33.921,97.512 r0 top
X11 "BM06B-SRSS-TB" BM06B-SRSS-TB 25.775,97.512 r0 top
XTAL1 "ABM3-8.000MHZ-D2Y-T" ABM3 9.61,76.25 r90 bottom value="8.0 MHz"
Y1 "HXO-36B 50.000 HZ" D7SX 24.825,77.2 r180 top value="50 MHz"

## Footprints (in the part's own frame and the unit in brackets; to place one, negate y for a bottom-side part, rotate by r counter-clockwise, add the part's x,y. Pads: shape width x height; smd on the part's side, far side on the other; paste and mask are expansions set on the pad)
ABM3 [mm]
  rect 1.9x2.4 smd mask+0.05: 1(-2.05,0) 2(2.05,0)
  silkscreen extent -2.6,-1.7 2.6,1.7, body extent -2.6,-1.7 2.6,1.7, height 1.3
B2B-PH-K-S [mm]
  rect 1.4x1.4 / inner rect 0x0 / far side rect 1.4x1.4 hole 0.8: 1(-1,0)
  round 1.4 / inner round 0 / far side round 1.4 hole 0.8: 2(1,0)
  silkscreen extent -2.95,-2.8 2.95,1.7, body extent -2.95,-2.8 2.95,1.7, height 6
B3B-PH-K-S [mm]
  rect 1.4x1.4 / inner rect 0x0 / far side rect 1.4x1.4 hole 0.8: 1(-2,0)
  round 1.4 / inner round 0 / far side round 1.4 hole 0.8: 2(0,0) 3(2,0)
  silkscreen extent -3.95,-2.8 3.95,1.7, body extent -3.95,-2.8 3.95,1.7, height 6
B4B-PH-K-S [mm]
  rect 1.4x1.4 / inner rect 0x0 / far side rect 1.4x1.4 hole 0.8: 1(-3,0)
  round 1.4 / inner round 0 / far side round 1.4 hole 0.8: 2(-1,0) 3(1,0) 4(3,0)
  silkscreen extent -4.95,-2.8 4.95,1.7, body extent -4.95,-2.8 4.95,1.7, height 6
B4B-XH-A [mm]
  rect 1.5x1.5 hole 0.9: 1(-3.75,0)
  round 1.5 hole 0.9: 2(-1.25,0) 3(1.25,0) 4(3.75,0)
  silkscreen extent -6.2,-3.4 6.2,2.35, body extent -6.19,-3.4 6.21,2.35, height 7
B6B-PH-SM4-TB [mm]
  rect 1x5.8 smd: 1(-5,-1.1) 2(-3,-1.1) 3(-1,-1.1) 4(1,-1.1) 5(3,-1.1) 6(5,-1.1)
  rect 1.6x3 smd: 7(-7.4,1.1) 8(7.4,1.1)
  silkscreen extent -7.95,-1.4 7.95,3.6, body extent -7.95,-3.4 7.95,3.6, height 6.6
BLM18AG102BH1D [mm]
  rect 0.65x0.7 smd: 1(-0.675,0) 2(0.675,0)
  silkscreen extent 0,-0.3 0,0.3, body extent -0.93,-0.4 0.93,0.4, height 1.05
BM02B-SRSS-TB [mm]
  rect 0.6x1.55 smd: 1(-0.5,-1.263) 2(0.5,-1.263)
  rect 1.2x1.8 smd: 3(-1.8,1.263) 4(1.8,1.263)
  silkscreen extent -2,-2.68 2,1.96, body extent -2,-1.54 2,2.06, height 4.25
BM03B-SRSS-TB [mm]
  rect 0.6x1.55 smd: 1(-1,-1.262) 2(0,-1.262) 3(1,-1.262)
  rect 1.2x1.8 smd: 4(-2.3,1.263) 5(2.3,1.263)
  silkscreen extent -2.5,-0.94 2.5,1.96, body extent -2.51,-1.64 2.49,1.96, height 4.25
BM04B-SRSS-TB [mm]
  rect 0.6x1.55 smd: 1(-1.5,-1.263) 2(-0.5,-1.263) 3(0.5,-1.263) 4(1.5,-1.263)
  rect 1.2x1.8 smd: 5(-2.8,1.263) 6(2.8,1.263)
  silkscreen extent -3,-2.68 3,1.96, body extent -3,-1.62 3,1.98, height 4.25
BM06B-SRSS-TB [mm]
  rect 0.6x1.55 smd: 1(-2.5,-1.262) 2(-1.5,-1.262) 3(-0.5,-1.262) 4(0.5,-1.262) 5(1.5,-1.262) 6(2.5,-1.262)
  rect 1.2x1.8 smd: 7(-3.8,1.263) 8(3.8,1.263)
  silkscreen extent -4,-2.73 4,1.96, body extent -4,-1.54 4,2.06, height 4.25
C0603 [mm]
  rect 0.95x1 smd: 1(-0.8,0) 2(0.8,0)
  silkscreen extent 0,-0.4 0,0.4, body extent -0.81,-0.41 0.79,0.39, height 0.8
C0805 [mm]
  rect 0.95x1.4 smd: 1(-1,0) 2(1,0)
  silkscreen extent -0.1,-0.6 0.1,0.6, body extent -1.02,-0.63 0.98,0.62, height 0.85
C1206 [mm]
  rect 1.15x1.8 smd: 1(-1.5,0) 2(1.5,0)
  silkscreen extent -0.4,-0.8 0.4,0.8, body extent -1.6,-0.8 1.6,0.8, height 1.6
C1210 [mm]
  rrect50% 1x2.9 smd: 1(-1.7,0) 2(1.7,0)
  silkscreen extent -0.7,-1.2 0.7,1.2, body extent -1.5,-1.3 1.7,1.2, height 2.5
CDRH8D43 [mm]
  rect 2x3 smd: 1(-4,0) 2(4,0)
  silkscreen extent -3.75,-4 3.75,4, body extent -4.34,-4 4.34,4, height 4.5
CTD [mm]
  rect 2.3x2.45 smd: 1(-3.1,0) 2(3.1,0)
  silkscreen extent -3.75,-2.25 3.75,2.25, body extent -3.65,-2.15 3.65,2.15, height 2.8
D7SX [mm]
  oct 1.6x1.8 smd: 1(-2.7,-1.8)
  rect 1.6x1.8 smd: 2(2.7,-1.8) 3(2.7,1.8) 4(-2.7,1.8)
  silkscreen extent -3.56,-2.92 3.43,2.92, body extent -3.5,-2.5 3.5,2.5, height 1.5
KAA-3528 [mm]
  rect 1.5x0.9 smd: 1(-1.55,0.725) 2(1.55,0.725) 3(1.55,-0.725) 4(-1.55,-0.725)
  silkscreen extent -3.3,-1.4 1.6,1.7, body extent -1.75,-1.4 1.75,1.4, height 1.8
LQFP100 [mm]
  rect 1.75x0.3 smd: 1(-7.575,6) 2(-7.575,5.5) 3(-7.575,5) 4(-7.575,4.5) 5(-7.575,4) 6(-7.575,3.5) 7(-7.575,3) 8(-7.575,2.5) 9(-7.575,2) 10(-7.575,1.5) 11(-7.575,1) 12(-7.575,0.5) 13(-7.575,0) 14(-7.575,-0.5) 15(-7.575,-1) 16(-7.575,-1.5) 17(-7.575,-2) 18(-7.575,-2.5) 19(-7.575,-3) 20(-7.575,-3.5) 21(-7.575,-4) 22(-7.575,-4.5) 23(-7.575,-5) 24(-7.575,-5.5) 25(-7.575,-6) 51(7.575,-6) 52(7.575,-5.5) 53(7.575,-5) 54(7.575,-4.5) 55(7.575,-4) 56(7.575,-3.5) 57(7.575,-3) 58(7.575,-2.5) 59(7.575,-2) 60(7.575,-1.5) 61(7.575,-1) 62(7.575,-0.5) 63(7.575,0) 64(7.575,0.5) 65(7.575,1) 66(7.575,1.5) 67(7.575,2) 68(7.575,2.5) 69(7.575,3) 70(7.575,3.5) 71(7.575,4) 72(7.575,4.5) 73(7.575,5) 74(7.575,5.5) 75(7.575,6)
  rect 0.3x1.75 smd: 26(-6,-7.575) 27(-5.5,-7.575) 28(-5,-7.575) 29(-4.5,-7.575) 30(-4,-7.575) 31(-3.5,-7.575) 32(-3,-7.575) 33(-2.5,-7.575) 34(-2,-7.575) 35(-1.5,-7.575) 36(-1,-7.575) 37(-0.5,-7.575) 38(0,-7.575) 39(0.5,-7.575) 40(1,-7.575) 41(1.5,-7.575) 42(2,-7.575) 43(2.5,-7.575) 44(3,-7.575) 45(3.5,-7.575) 46(4,-7.575) 47(4.5,-7.575) 48(5,-7.575) 49(5.5,-7.575) 50(6,-7.575) 76(6,7.575) 77(5.5,7.575) 78(5,7.575) 79(4.5,7.575) 80(4,7.575) 81(3.5,7.575) 82(3,7.575) 83(2.5,7.575) 84(2,7.575) 85(1.5,7.575) 86(1,7.575) 87(0.5,7.575) 88(0,7.575) 89(-0.5,7.575) 90(-1,7.575) 91(-1.5,7.575) 92(-2,7.575) 93(-2.5,7.575) 94(-3,7.575) 95(-3.5,7.575) 96(-4,7.575) 97(-4.5,7.575) 98(-5,7.575) 99(-5.5,7.575) 100(-6,7.575)
  silkscreen extent -7.7,-6.3 6.3,6.82, body extent -7,-7 7,7, height 1.6
LU1T516-43 [mm]
  round 1.4 hole 0.9: 1(4.445,-6.35) 2(3.175,-9.525) 3(1.905,-6.35) 4(0.635,-9.525) 5(-0.635,-6.35) 6(-1.905,-9.525) 7(-3.175,-6.35) 8(-4.445,-9.525)
  round 1.8 hole 1.02: 9(6.35,5.08) 10(3.81,3.175) 11(-3.81,5.08) 12(-6.35,3.175)
  round 2.5 hole 1.8: 13(-7.62,-3.175) 14(7.62,-3.175)
  round 3.3 hole 3.3: 15(-5.715,0) 16(5.715,0)
  silkscreen extent -8,-11 8,12, body extent -8,-10.65 8,10.65, height 13.15
QFN28 [mm]
  rect 0.95x0.25 smd: 1(-2.35,1.5) 2(-2.35,1) 3(-2.35,0.5) 4(-2.35,0) 5(-2.35,-0.5) 6(-2.35,-1) 7(-2.35,-1.5) 15(2.35,-1.5) 16(2.35,-1) 17(2.35,-0.5) 18(2.35,0) 19(2.35,0.5) 20(2.35,1) 21(2.35,1.5)
  rect 0.25x0.95 smd: 8(-1.5,-2.35) 9(-1,-2.35) 10(-0.5,-2.35) 11(0,-2.35) 12(0.5,-2.35) 13(1,-2.35) 14(1.5,-2.35) 22(1.5,2.35) 23(1,2.35) 24(0.5,2.35) 25(0,2.35) 26(-0.5,2.35) 27(-1,2.35) 28(-1.5,2.35)
  rect 3.15x3.15 smd: 29(0,0)
  silkscreen extent -3.17,-2.65 2.65,2.65, body extent -2.55,-2.55 2.55,2.55, height 0.9
QFN32_5X5MC_MCH [mil]
  rect 32x10 smd paste+0 mask+0: 1(-96.5,70) 2(-96.5,50) 3(-96.5,30) 4(-96.5,10) 5(-96.5,-10) 6(-96.5,-30) 7(-96.5,-50) 8(-96.5,-70) 17(96.5,-70) 18(96.5,-50) 19(96.5,-30) 20(96.5,-10) 21(96.5,10) 22(96.5,30) 23(96.5,50) 24(96.5,70)
  rect 10x32 smd paste+0 mask+0: 9(-70,-96.5) 10(-50,-96.5) 11(-30,-96.5) 12(-10,-96.5) 13(10,-96.5) 14(30,-96.5) 15(50,-96.5) 16(70,-96.5) 25(70,96.5) 26(50,96.5) 27(30,96.5) 28(10,96.5) 29(-10,96.5) 30(-30,96.5) 31(-50,96.5) 32(-70,96.5)
  rect 134x134 smd paste-66.5 mask-66.5: 33(0,0)
  silkscreen extent -102,-132 132,132, body extent -101,-101 101,101, height 55
R0603 [mm]
  rect 0.95x1 smd: 1(-0.8,0) 2(0.8,0)
  silkscreen extent 0,-0.4 0,0.4, body extent -0.8,-0.4 0.8,0.4, height 0.45
R1210 [mm]
  rect 1.6x2.7 smd: 1(-1.4,0) 2(1.4,0)
  silkscreen extent -0.3,-1.25 0.3,1.25, body extent -1.6,-1.3 1.5,1.3, height 0.47
SFLAT [mm]
  rect 1.2x1.2 smd: 1(-1.4,0) 2(1.4,0)
  silkscreen extent -1.3,-0.8 1.3,0.8, body extent -1.75,-0.8 1.75,0.8, height 0.98
SOD323 [mm]
  rect 1.3x0.6 smd: 1(-1.25,0) 2(1.25,0)
  silkscreen extent -0.95,-0.7 0.95,0.7, body extent -1.35,-0.67 1.35,0.67, height 0.79
SOT23-6 [mm]
  rrect50% 1x0.6 smd: 1(-1.3,0.95) 2(-1.3,0) 3(-1.3,-0.95) 4(1.3,-0.95) 5(1.3,0) 6(1.3,0.95)
  silkscreen extent -1.38,-1.42 0.55,1.95, body extent -1.5,-1.5 1.5,1.5, height 1.45
SOT323 [mm]
  rect 0.7x0.9 smd: 1(-0.65,-0.95) 2(0.65,-0.95) 3(0,0.95)
  silkscreen extent -1.05,-0.15 1.05,0.6, body extent -0.99,-1.04 1.01,1.06, height 1.1
TZA07A [mil]
  rect 31x117 smd paste+0 mask+0: 1(-150,-320.5) 2(-100,-320.5) 3(-50,-320.5) 4(0,-320.5) 5(50,-320.5) 6(100,-320.5) 7(150,-320.5)
  rect 414x438 smd paste+0 mask+0: 8(0,2)
  silkscreen extent -165,-248 164,-230, body extent -200,-348 200,194, height 186
URB2412LD-30WR3 [mm] "DC-DC Brick"
  rect 2.3x2.3 hole 1.5: 1(-22.86,7.62) 2(-22.86,-2.54) 3(-22.86,-7.62) 4(22.86,-10.16) 5(22.86,0) 6(22.86,10.16)
  silkscreen extent -25.45,-12.75 25.45,12.75, body extent -25.45,-12.75 25.45,12.75, height 11.8
VLCF4020T [mm]
  rect 4x1.8 smd: 1(0,1.55) 2(0,-1.55)
  silkscreen extent -2,-0.3 2,0.3, body extent -2.01,-2.13 1.99,1.87, height 2

## Part data
C1 C2 C4 C6 C21 C22 C24 C25 C26 C27 C33 C35 C38 C40 C42 C44 C46 C48 C50: "Ceramic Capacitor", Supplier Part Number 1=445-1324-1-ND, Supplier 1=Digi-Key
C3 C36 C37: "Ceramic Capacitor", Supplier 1=Digi-Key
C5: "Ceramic Capacitor", Supplier Part Number 1=445-6007-1-ND, Supplier 1=Digi-Key
C7: "Ceramic Capacitor", Supplier Part Number 1=1276-2723-2-ND, Supplier 1=Digi-Key
C8 C18 C23: "Ceramic Capacitor", Supplier Part Number 1=490-10511-1-ND, Supplier 1=Digi-Key
C9 C17: "Ceramic Capacitor", Supplier Part Number 1=490-1513-1-ND, Supplier 1=Digi-Key
C10 C16: "Ceramic Capacitor", Supplier Part Number 1=445-1311-1-ND, Supplier 1=Digi-Key, Supplier 2=Digi-Key, Supplier 3=Digi-Key, Supplier Part Number 2=478-1227-1-ND, Supplier Part Number 3=GRM188R61H103KA01D-ND
C11 C12 C13 C14: "Tantalum Capacitor", Supplier Part Number 1=478-1730-2-ND, Supplier 1=Digi-Key
C15: "Tantalum Capacitor", Supplier Part Number 1=478-1723-1-ND, Supplier 1=Digi-Key
C19 C20: "Ceramic Capacitor", Supplier Part Number 1=445-8028-1-ND, Voltage=6.3V, Supplier 1=Digi-Key
C28: "Ceramic Capacitor", Supplier Part Number 1=445-1309-1-ND, Supplier 1=Digi-Key
C29: "Ceramic Capacitor", Supplier Part Number 1=445-4045-1-ND, Supplier 1=Digi-Key
C30 C31: "Ceramic Capacitor", Supplier Part Number 1=445-1270-1-ND, Supplier 1=Digi-Key
C32 C34: "Ceramic Capacitor", Supplier Part Number 1=445-3464-1-ND, Supplier 1=Digi-Key
C39: "Ceramic Capacitor", Supplier Part Number 1=PCC2174TR-ND, Supplier 1=Digi-Key
C41 C43 C45 C47 C49 C51: "Ceramic Capacitor", Supplier Part Number 1=445-7478-1-ND, Supplier 1=Digi-Key
D3: "Diode", Current - Average Rectified (Io)=150mA, Supplier Part Number 1=1N4148WSFSCT-ND, Voltage - DC Reverse (Vr) (Max)=75V, HelpUrl="\\Storage\Volume_2\SPEKTR-AT\Catalogs\General Semiconductor\Diodes\1N4148W.pdf", Supplier 1=Digi-Key, Type="DIODE 75V 150MA SOD323F"
DA1: "4.5-V to 24-V Input, 3-A Output Synchronous Buck Converter"
DA2: "PWM step-down DC/DC / converter", Supplier Part Number 1=LT1933ES6#TRPBFCT-ND, Help URL=https://www.analog.com/media/en/technical-documentation/data-sheets/1933fe.pdf, Supplier 1=Digi-Key
DA4: "DC/DC Converter", HelpUrl=https://www.mornsun-power.com/uploads/pdf/URA_LD-30WR3.pdf
FL1: "Filter", Manufacturer_Name="Murata Electronics", Mouser Part Number=81-BLM18PG121SN1D, Arrow Part Number=BLM18PG121SN1D, Arrow Price/Stock=https://www.arrow.com/en/products/blm18pg121sn1d/murata-manufacturing, Datasheet Link=https://www.murata.com/en-us/products/productdetail?partno=BLM18PG121SN1%23, Height=0.95mm, Manufacturer_Part_Number=BLM18PG121SN1D, Mouser Price/Stock=https://www.mouser.co.uk/ProductDetail/Murata-Electronics/BLM18PG121SN1D?qs=tY8e8KZalarVxhnmnUYZ1A%3D%3D
L1: "Inductor", Current=4.1A, Supplier Part Number 1=308-2317-2-ND, HelpUrl=http://products.sumida.com/products/pdf/CDRH8D43.pdf?__cf_chl_captcha_tk__=f2dd78b9027a2fe299a3aea71ee132a4cfb9459e-1615548098-0-AWv3dTlkYHb3pOZx47LrfRgQQvnbYyh137kl7uefua50nLxSKUUGrqtlCCjrc1LswX_-r6oJbyvsXa0yR2eZdE77H7aOBf-QBKkOOMSNJ3pig1erzpUNp_TWXk-67akAQoTQvkftj8OlbHqQ4H9RdFe8fQ1CNp0rbmLJm5OjBfnKhuu7dCwp-XrQqmHs-aSAf8GurMArTLM56usz57RsDvF83AfaOxVDPdkr-RR6vFv2ejXMzOBUncU1xYUxw2-FtoS50eUSjk3uK32pDW9RQcB7at0zBTfYb7z1XEUU3cNH-LJQFJ6S0r5aCxNOxKsPMag80AtDB68AL3MlL4250ERsFMEv8i6qyXeCYUzPNYhi5Kb7tXKzIjKI_FhX1Ng3Qx8LpjLxEYYXtRJxk8ucr1dLSxq3fgiNj3w-8N0UD2uklKGxzL9lR3tVA2FN_GumzljjVLssxYWb0rvnE7uglc0dEdjxHXEVFs1mSRKMElWKfz_-O5_flhZzggBpUNnWAvtXJkCTCVIunYUQ6UPsGfkNtnBhdXmaIx3qARKHbMCtbeIkj50XdSCf7pF1-MSMB-QwGxhNOsgDZ-CJKYC0bho, Supplier 1=DigiKey
L2: "Inductor", Current=0.85A, Supplier Part Number 1=445-3186-1-ND, HelpUrl=\\Storage\Volume_2\SPEKTR-AT\Catalogs\Tdk\Inductors\vlcf4020.pdf, Supplier 1=Digi-Key
R1: "Chip Resistor", Supplier Part Number 1=P30.0HCT-ND, Supplier 1=Digi-Key
R2: "Chip Resistor", Supplier Part Number 1=P51.0KHCT-ND, Supplier 1=Digi-Key
R3 R4 R6 R9 R18 R20 R21 R22 R23 R26 R27 R29: "Chip Resistor", Supplier Part Number 1=P10.0KHCT-ND, Supplier 1=Digi-Key
R5: "Chip Resistor", Supplier Part Number 1=P16.9KHCT-ND, Supplier 1=Digi-Key
R7: "Chip Resistor", Supplier Part Number 1=P5.36KHCT-ND, Supplier 1=Digi-Key
R8: "Chip Resistor", Supplier Part Number 1=P61.9KHCT-ND, Supplier 1=Digi-Key
R10: "Chip Resistor", Supplier Part Number 1=P1.00KHCT-ND, Supplier 1=Digi-Key
R11: "Chip Resistor", Supplier Part Number 1=P3.60KHCT-ND, Supplier 1=Digi-Key
R12 R19: "Chip Resistor", Supplier Part Number 1=P300HCT-ND, Supplier 1=Digi-Key
R13 R14 R15 R16: "Chip Resistor", Supplier Part Number 1=P49.9HTR-ND, Supplier 1=Digi-Key
R17: "Chip Resistor", Supplier Part Number 1=P12.1KHTR-ND, Supplier 1=Digi-Key
R24 R25: "Chip Resistor", Supplier Part Number 1=311-0.12NATR-ND, Supplier 1=Digi-Key
R30 R31 R32: "Chip Resistor", Supplier Part Number 1=P100KHCT-ND, Supplier 1=Digi-Key
R33: "Chip Resistor", Supplier Part Number 1=P75.0HCT-ND, Supplier 1=Digi-Key
R34: "Chip Resistor", Supplier Part Number 1=P100HCT-ND, Supplier 1=Digi-Key
R35: "Chip Resistor"
R36: "Chip Resistor", Supplier Part Number 1=P41.2KHCT-ND, Supplier 1=Digi-Key
U1: "Small Footprint MII/RMII 10/100 Ethernet / Transceiver with HP Auto-MDIX and / flexPWR® Technology", Built_By=EMA_UL_Team, Copyright="Copyright (C) 2018 Accelerated Designs. All rights reserved", Manufacturer_Part_Number=LAN8710A-EZC, RefDes=RefDes, SourceLibrary=Microchip_2014-12-15, Type=DEV, Vendor=Microchip
U2: "Ultra-silent motor driver IC for two phase stepper motors.", Built_By=EMA_Cory, Copyright="Copyright (C) 2018 Accelerated Designs. All rights reserved", Datasheet=https://www.trinamic.com/products/integrated-circuits/details/tmc2209-la/, Manufacturer_Part_Number=TMC2209-LA, RefDes=RefDes, SourceLibrary=Add_to_database_2020-10-29, Type=DEV, Vendor=Trinamic
VD1: library part CRS09(TE85L,Q,M), "Diode Schottky", Supplier Part Number 1=CRS09QCT-ND, Supplier 1=Digi-Key
VD2: "High red, super green", Red/green max voltage="2,5 V", Red/green nominal current="30 mA/ 25 mA", Red/green nominal voltage="2,0 V/ 2,2 V", Red/green peak current="160 mA/ 140 mA", HelpUrl=\\Storage\Volume_2\SPEKTR-AT\Catalogs\Kingbright\KAA-3528ESGC.pdf, Red/green peak wave length="627 nm/ 565 nm"
VT1: "NPN", Supplier Part Number 1=DDTC114EUA-FDICT-ND, HelpUrl=\\storage\volume_2\SPEKTR-AT\Catalogs\Rohm\Transistors\DTC114EE.pdf, Iout="50...100 mA", Supplier 1=Digi-Key, Type="TRANS PREBIAS NPN 200MW SC70-3", Vin="-10...40 V", Vout=0.1V
X1: "Ethernet RJ-45"
X2 X3: "Connector, 2mm", Current=2A, Supplier Part Number 1=455-1262-ND, Voltage=100V, HelpUrl=\\Storage\Volume_2\SPEKTR-AT\Catalogs\Jst\PH.pdf, Supplier 1=Digi-Key
X4: "Connector, 2mm", Current=2A, Supplier Part Number 1=455-1738-1-ND, Voltage=100V, HelpUrl=\\Storage\Volume_2\SPEKTR-AT\Catalogs\Jst\PH.pdf, Supplier 1=Digi-Key
X5: "Connector, 2.5mm", Current=3A, Supplier Part Number 1=455-2249-ND, Voltage=250V, HelpUrl=\\Storage\Volume_2\SPEKTR-AT\Catalogs\Jst\eXH.pdf, Supplier 1=Digi-Key
X6: "Connector, 1mm", Current=0.7A, Supplier Part Number 1=455-1406-1-ND, Voltage=50V, HelpUrl=\\Storage\Volume_2\SPEKTR-AT\Catalogs\Jst\eSR.pdf, Supplier 1=Digi-Key
X7: "Connector, 2mm", Current=2A, Supplier Part Number 1=455-1273-ND, Voltage=100V, HelpUrl=\\Storage\Volume_2\SPEKTR-AT\Catalogs\Jst\PH.pdf, Supplier 1=Digi-Key
X8: "Connector, 2mm", Current=2A, Supplier Part Number 1=455-1279-ND, Voltage=100V, HelpUrl=\\Storage\Volume_2\SPEKTR-AT\Catalogs\Jst\PH.pdf, Supplier 1=Digi-Key
X9: "Connector, 1mm", Current=0.7A, Supplier Part Number 1=455-1408-1-ND, Voltage=50V, HelpUrl=\\Storage\Volume_2\SPEKTR-AT\Catalogs\Jst\eSR.pdf, Supplier 1=Digi-Key
X10: "Connector, 1mm", Current=0.7A, Supplier Part Number 1=455-1407-1-ND, Voltage=50V, HelpUrl=\\Storage\Volume_2\SPEKTR-AT\Catalogs\Jst\eSR.pdf, Supplier 1=Digi-Key
X11: "Connector, 1mm", Current=0.7A, Supplier Part Number 1=455-1410-1-ND, Voltage=50V, HelpUrl=\\Storage\Volume_2\SPEKTR-AT\Catalogs\Jst\eSR.pdf, Supplier 1=Digi-Key
XTAL1: "Quartz", Supplier Part Number 1=535-10630-2-ND, HelpUrl=https://abracon.com/Resonators/abm3.pdf, Supplier 1=Digi-Key
DA3: Type="1A SIMPLE SWITCHER® Power Module with 20V Maximum  Input Voltage"

## Free pads (board coordinates)
  round 1.2 hole 2.5 unplated: 1(10,30) 1(10,70) 1(50,30) 1(50,70)

## Via types
v1: diameter 0.6, hole 0.3, Top Layer to Layer 3, 42 vias
v2: diameter 1.27, hole 0.711, Top Layer to Layer 3, 35 vias
v3: diameter 0.4, hole 0.2, Layer 3 to Bottom Layer, 23 vias
v4: diameter 0.4, hole 0.2, Top Layer to Layer 3, 21 vias
v5: diameter 0.5, hole 0.3, Top Layer to Bottom Layer, tented both sides, 19 vias
v6: diameter 0.4, hole 0.2, Top Layer to Layer 2, 17 vias
v7: diameter 0.4, hole 0.2, Layer 2 to Bottom Layer, 15 vias
v8: diameter 1.27, hole 0.711, Layer 3 to Bottom Layer, 7 vias
v9: diameter 0.5, hole 0.3, Top Layer to Layer 3, tented both sides, 7 vias
v10: diameter 2.5, hole 2, Top Layer to Bottom Layer, 4 vias
v11: diameter 0.6, hole 0.3, Top Layer to Bottom Layer, 3 vias
v12: diameter 0.6, hole 0.3, Top Layer to Layer 2, 3 vias
v13: diameter 0.4, hole 0.2, Top Layer to Bottom Layer, 2 vias
v14: diameter 1.27, hole 0.711, Top Layer to Layer 2, 2 vias
v15: diameter 0.6, hole 0.3, Layer 2 to Bottom Layer, 1 vias
v16: diameter 0.6, hole 0.3, Layer 3 to Bottom Layer, 1 vias